# Altium PCB PCB1.PcbDoc
Units mil, origin at the board's own origin, x right, y up, seen from the top; angles counter-clockwise.
Board outline 3543.31 x 3543.31 mil, 2 copper layers (Top Layer, Bottom Layer); 103 components, 114 nets, 533 pads, 226 vias.
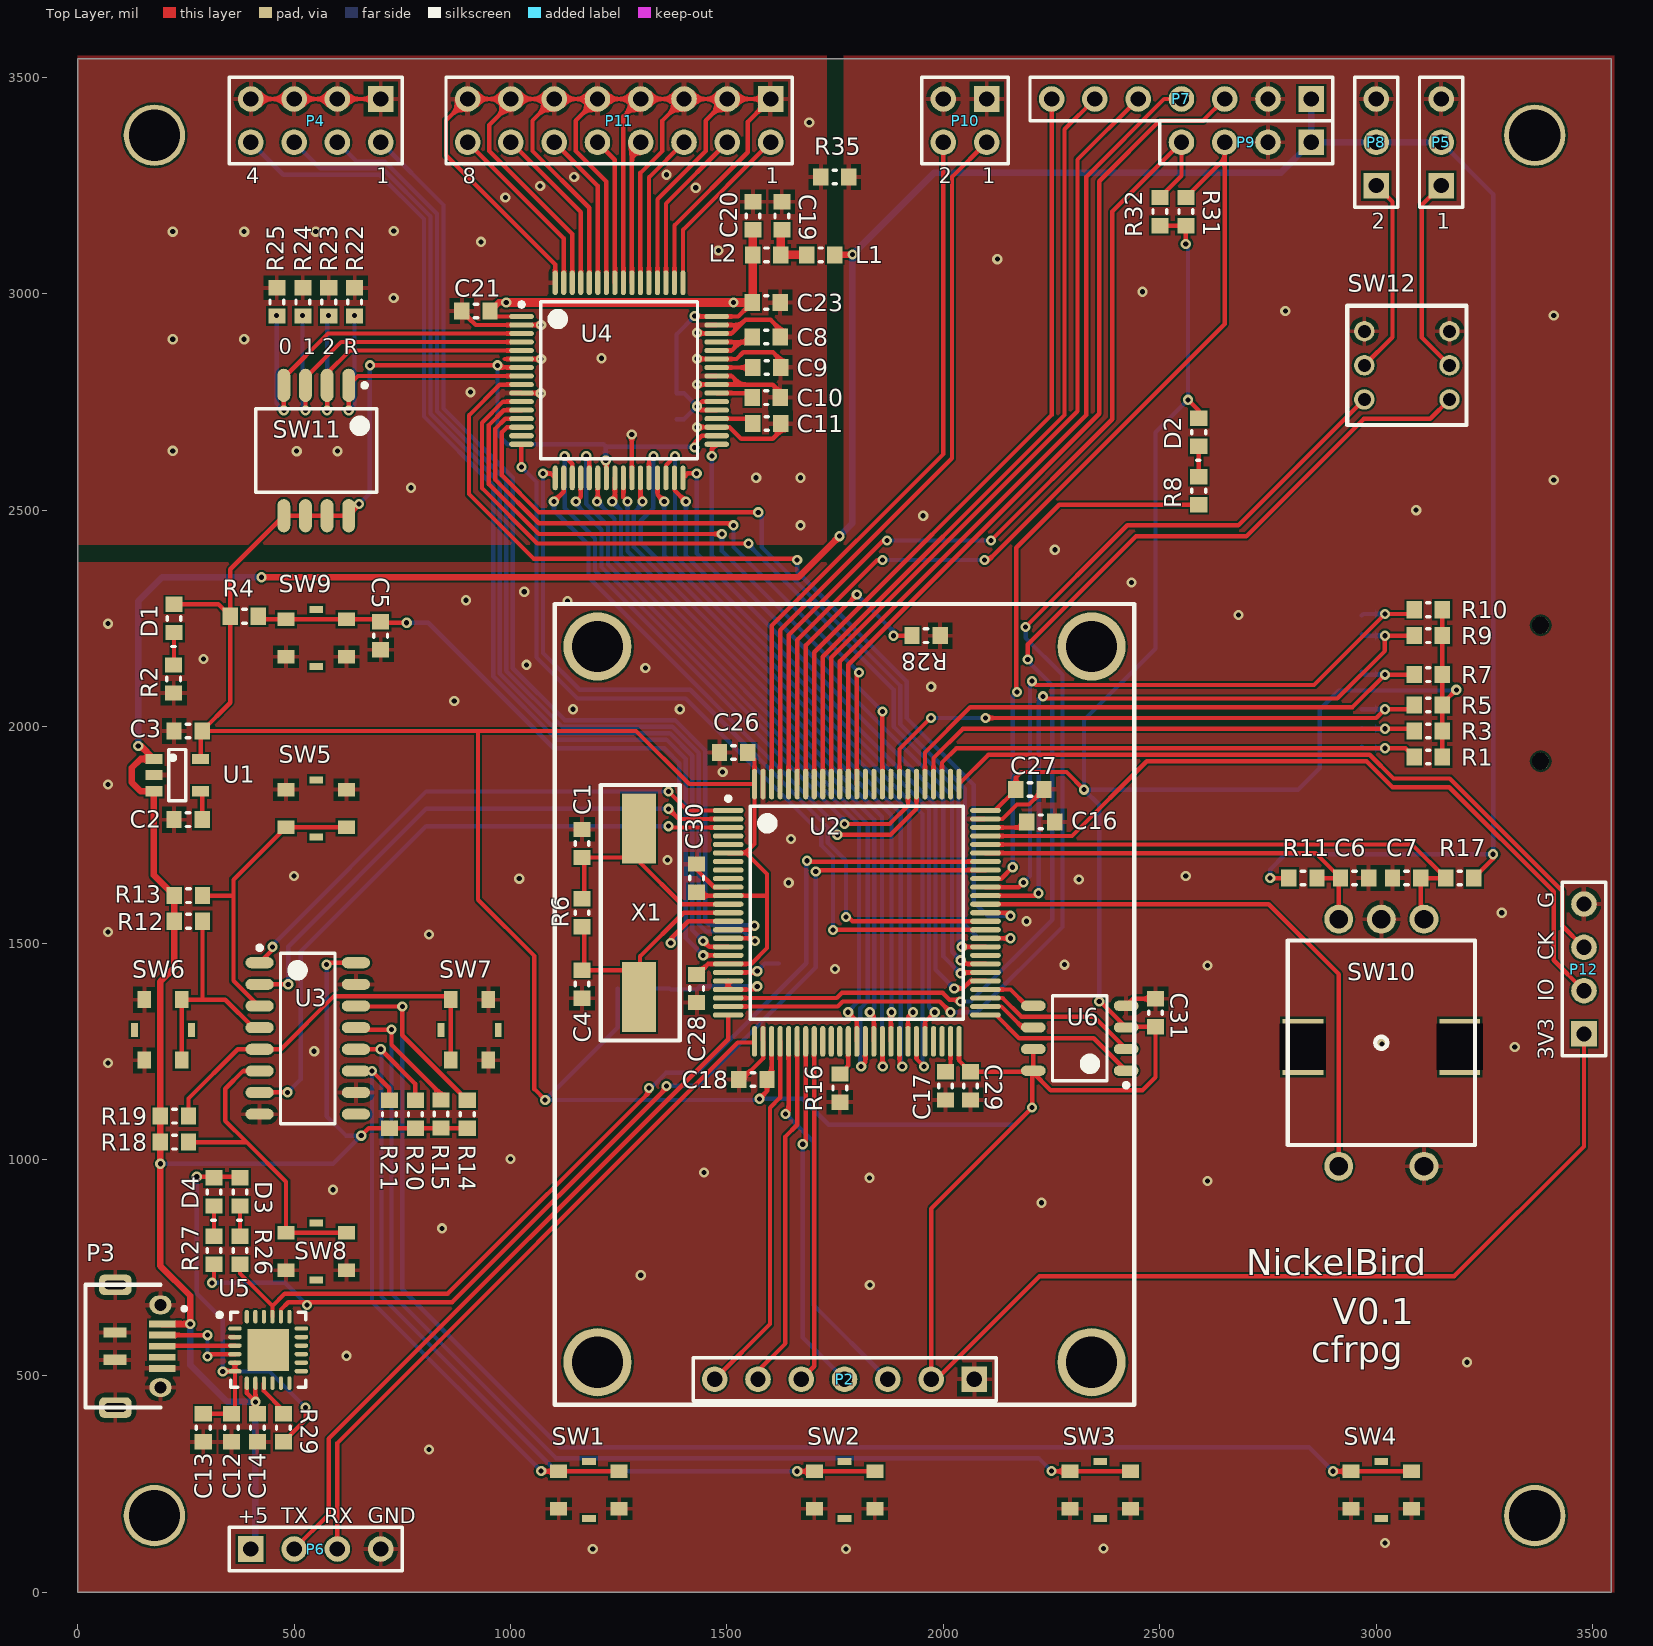
[diagram p0: Top Layer view]
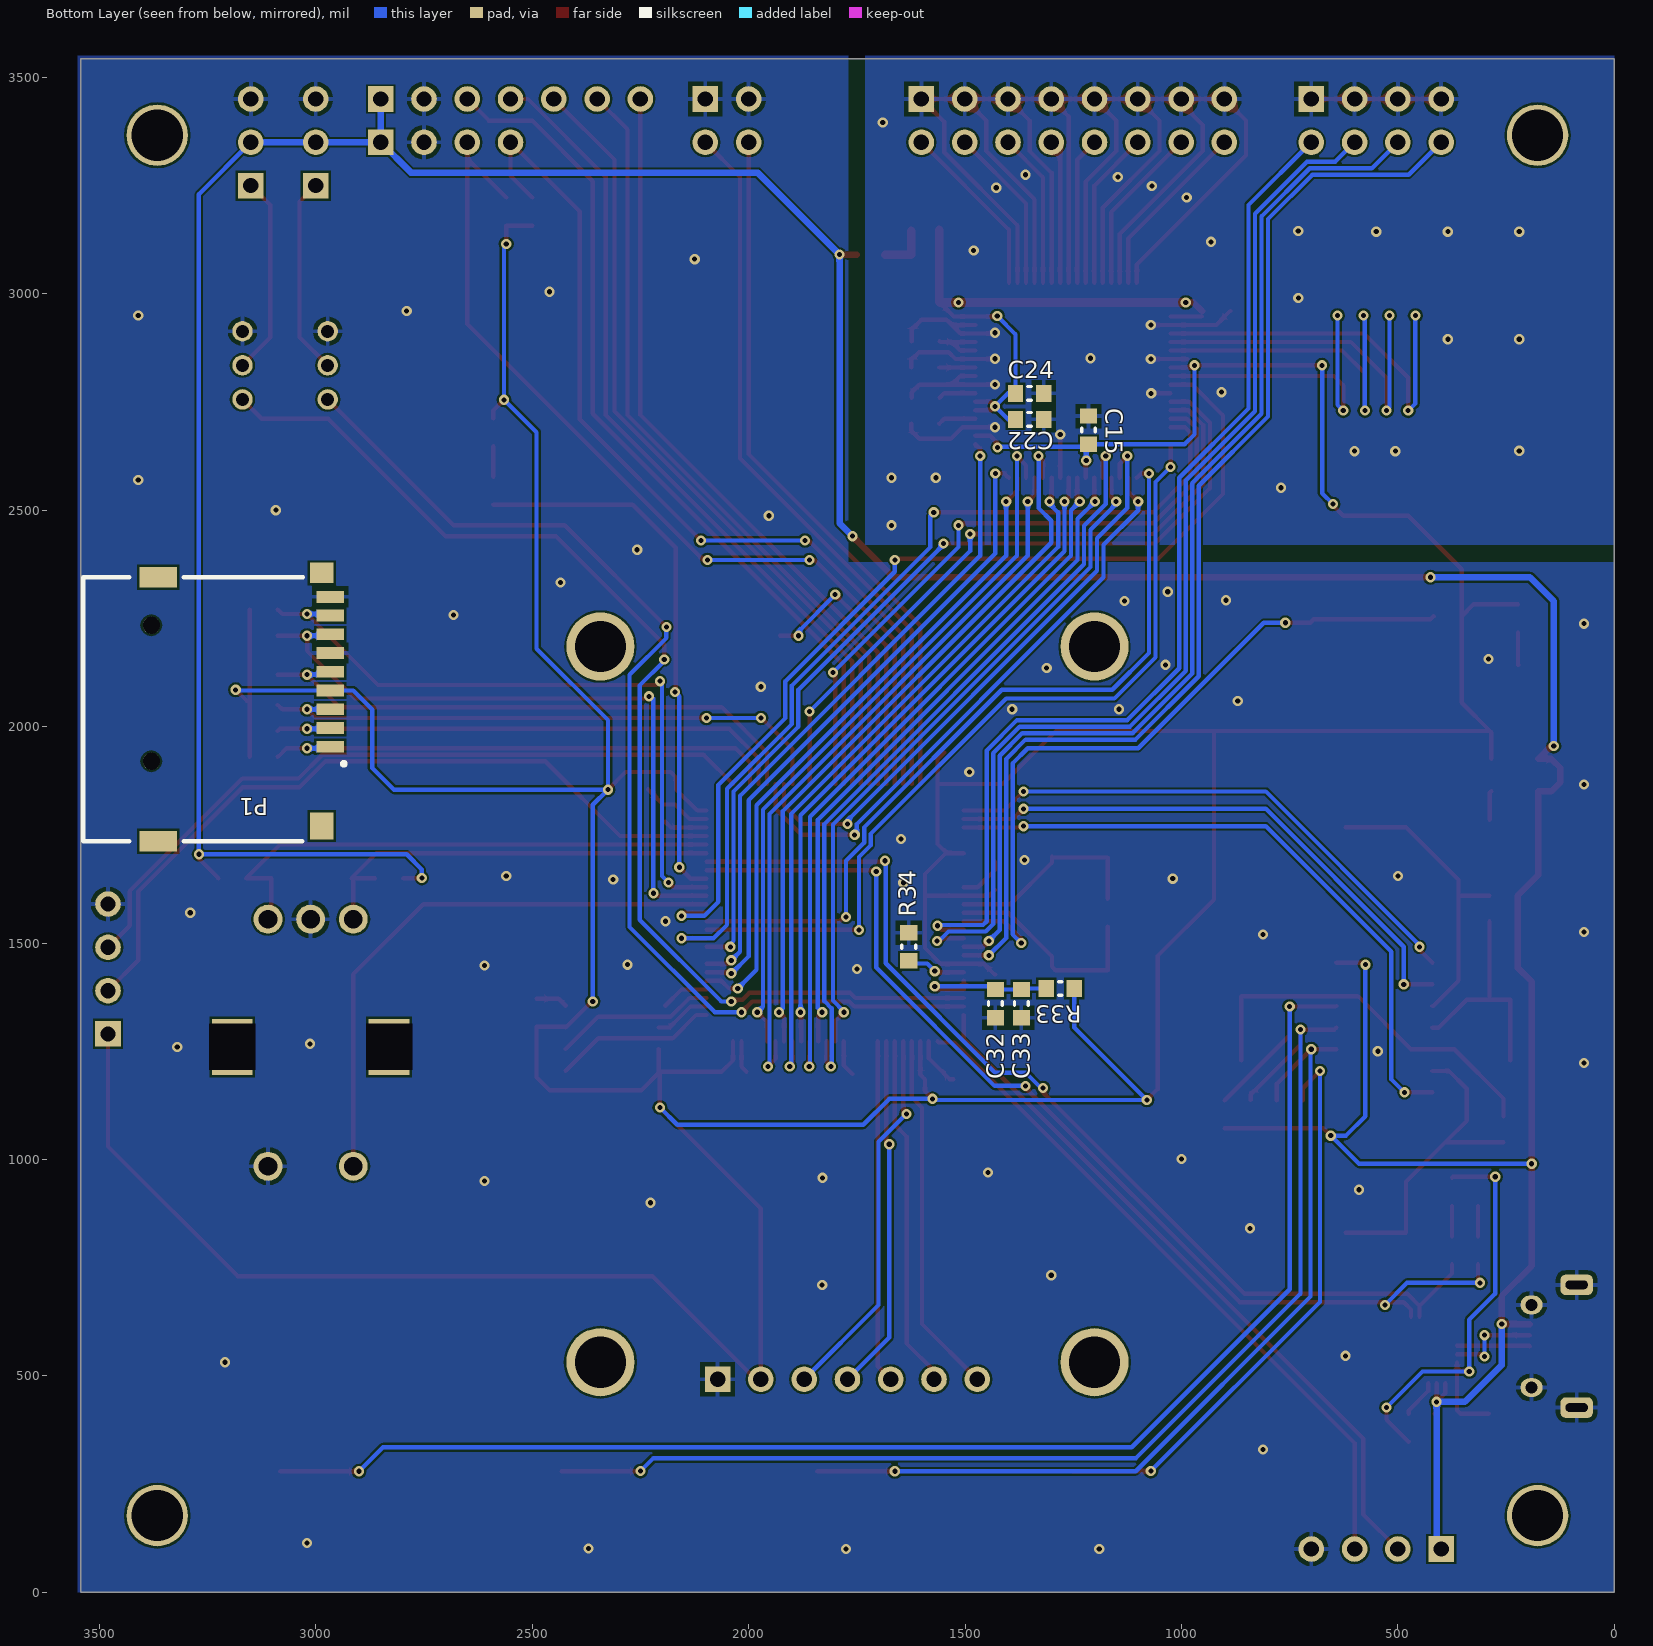
[diagram p1: Bottom Layer view, seen from below]

## Layer stack, top to bottom
Top Solder: solder mask 0.4, Solder Resist, Dk 3.5
Top Layer: signal copper 1.4
Dielectric 1: dielectric 12.6, FR-4, Dk 4.8
Bottom Layer: signal copper 1.4
Bottom Solder: solder mask 0.4, Solder Resist, Dk 3.5

## Board outline
0,0 3543.31,0 3543.31,3543.31 0,3543.31

## Design rules (kind name [scope] priority, off if disabled: settings)
Clearance [All] p1: gap=5 ignorepadtopadclearanceinfootprint=FALSE except(0: Arc-Hole Track-Hole SMDPad-Hole THPad-Hole Via-Hole Fill-Hole Poly-Hole Region-Hole Text-Hole)
PlaneConnect [All] p1: pad.planeconnectstyle=Relief pad.reliefexpansion=20 pad.reliefentries=4 pad.reliefconductorwidth=10 pad.reliefairgap=10 via.planeconnectstyle=Direct via.reliefexpansion=20 via.reliefentries=4 via.reliefconductorwidth=10 via.reliefairgap=10
PolygonConnect [All] p1: thpad.connectstyle=Relief thpad.reliefconductorwidth=10 thpad.reliefentries=4 thpad.polygonreliefangle="90 Angle" thpad.airgapwidth=10 smdpad.connectstyle=Relief smdpad.reliefconductorwidth=10 smdpad.reliefentries=4 smdpad.polygonreliefangle="90 Angle" smdpad.airgapwidth=10 via.connectstyle=Direct via.reliefconductorwidth=10 via.reliefentries=4 via.polygonreliefangle="90 Angle" via.airgapwidth=10
RoutingVias [All] p1: holewidth=11.81 width=23.62 viastyle="Through Hole" minholewidth=11.81 minwidth=23.62 maxholewidth=39.37 maxwidth=55.12
SolderMaskExpansion [All] p1: expansion=4
Width [All] p1: maxlimit=30 minlimit=5 preferedwidth=10 minimp=50.000000 maximp=50.000000 favimp=50.000000
29 further rules are at their usual default settings.

## Components (designator, comment, footprint, x,y, rotation, side; value= is the part's Value field where it differs from the comment)
C1 "20p" 0603 1165,1730 r90 top
C2 "470p" 0603 255,1785 r0 top
C3 "2.2u" 0603 255,1990 r0 top
C4 "20p" 0603 1165,1405 r270 top
C5 "1u" 0603 700,2210 r270 top
C6 "100n" 0603 2950,1650 r180 top
C7 "100n" 0603 3070,1650 r180 top
C8 "10u" 0603 1590.79,2900 r0 top
C9 "100n" 0603 1591.73,2829.53 r0 top
C10 "1u" 0603 1590.79,2760 r0 top
C11 "1u" 0603 1591.73,2700 r0 top
C12 "1u" 0603 355,380 r90 top
C13 "100n" 0603 290,380 r90 top
C14 "1u" 0603 415,380 r90 top
C15 "100n" 0603 1215,2685 r270 bottom
C16 "2.2u" 0603 2225,1780 r180 top
C17 "2.2u" 0603 2005,1170 r90 top
C18 "100n" 0603 1560,1185 r180 top
C19 "10u" 0603 1626.69,3180 r270 top
C20 "10u" 0603 1559.84,3180 r270 top
C21 "100n" 0603 920,2960 r0 top
C22 "100n" 0603 1350.79,2710 r0 bottom
C23 "100n" 0603 1590.79,2980 r180 top
C24 "100n" 0603 1350.79,2770 r0 bottom
C26 "100n" 0603 1515.35,1940 r0 top
C27 "100n" 0603 2200,1855 r180 top
C28 "100n" 0603 1430,1395 r90 top
C29 "100n" 0603 2062.52,1170 r90 top
C30 "100n" 0603 1430,1650 r270 top
C31 "100n" 0603 2490,1338.74 r270 top
C32 "100n" 0603 1430,1360 r270 bottom
C33 "10u" 0603 1370,1360 r270 bottom
D1 "LED" 0603-1 222.52,2250 r270 top
D2 "LED" 0603-1 2590,2680 r270 top
D3 "LED" 0603-1 375,925 r270 top
D4 "LED" 0603-1 315,925 r270 top
L1 "102" 0603 1716.69,3090 r180 top
L2 "102" 0603 1591.69,3090 r180 top
P1 "TFCard" "TF Card" 3380,2040.08 r270 bottom
P2 "Header 7" HDR1X7 2071.65,492.13 r180 top
P3 "MicroUSB" MicroUSB 17.99,568.5 r270 top
P4 "Header 4X2" HDR2X4 700,3450 r180 top
P5 "Header 3" HDR1X3 3150,3250 r90 top
P6 "Header 4" HDR1X4 400,100 r0 top
P7 "Header 7" HDR1X7 2850,3450 r180 top
P8 "Header 3" HDR1X3 3000,3250 r90 top
P9 "Header 4" HDR1X4 2850,3350 r180 top
P10 "Header 2X2" HDR2X2 2100,3450 r180 top
P11 "Header 8X2" HDR2X8 1600.79,3450 r180 top
P12 "Header 4" HDR1X4 3480,1290 r90 top
R1 "10k" 0603 3120,1930 r180 top
R2 "1k" 0603 221.73,2110 r270 top
R3 "10k" 0603 3120,1990 r180 top
R4 "10k" 0603 385,2255 r180 top
R5 "10k" 0603 3120,2050 r180 top
R6 "1M" 0603 1165,1570 r90 top
R7 "10k" 0603 3120,2120 r180 top
R8 "1k" 0603 2590,2545 r270 top
R9 "10k" 0603 3120,2210 r180 top
R10 "10k" 0603 3120,2270 r180 top
R11 "10k" 0603 2830.71,1650 r180 top
R12 "10k" 0603 255.91,1550.32 r180 top
R13 "10k" 0603 255.91,1609.37 r180 top
R14 "10k" 0603 900,1104.53 r270 top
R15 "10k" 0603 839.57,1105 r270 top
R16 "10k" 0603 1760.63,1165 r270 top
R17 "10k" 0603 3192.91,1650 r0 top
R18 "10k" 0603 223.43,1040 r0 top
R19 "10k" 0603 223.43,1100 r0 top
R20 "10k" 0603 780,1104.53 r90 top
R21 "10k" 0603 720,1104.53 r90 top
R22 "10k" 0603 640,2981.1 r90 top
R23 "10k" 0603 580,2981.1 r90 top
R24 "10k" 0603 520,2981.1 r90 top
R25 "10k" 0603 460,2981.1 r90 top
R26 "1k" 0603 375,790 r270 top
R27 "1k" 0603 315,790 r270 top
R28 "10k" 0603 1960,2210 r0 top
R29 "4.7k" 0603 475,380 r90 top
R31 "1.2k" 0603 2560,3190 r270 top
R32 "1.2k" 0603 2500,3190 r90 top
R33 "0R" 0603 1280,1395 r0 bottom
R34 "0R" 0603 1630,1491.26 r90 bottom
R35 "0R" 0603 1749.17,3270 r0 top
SW1 "Btn" BTN3*3 1181.1,236.22 r0 top locked
SW2 "Btn" BTN3*3 1771.65,236.22 r0 top locked
SW3 "Btn" BTN3*3 2362.2,236.22 r0 top locked
SW4 "Btn" BTN3*3 3011.81,236.22 r0 top locked
SW5 "Btn" BTN3*3 551.18,1811.02 r0 top locked
SW6 "Btn" BTN3*3 196.85,1299.21 r90 top locked
SW7 "Btn" BTN3*3 905.51,1299.21 r270 top locked
SW8 "Btn" BTN3*3 551.18,787.4 r180 top locked
SW9 "Btn" BTN3*3 551.18,2204.72 r0 top
SW10 "EC11" EC11 3110.24,984.25 r180 top
SW11 "SW-4P" SW-1.27-4P 551.18,2637.8 r270 top
SW12 "SW_DPDT" DPDT7mm 3070.87,2834.65 r180 top
U1 "MIC5219" SOT23-5 230,1887.99 r0 top
U2 "STM32F405VGT6" STM-LQFP100_N 1800,1570 r0 top
U3 "74LS165" SOP16 531.5,1279.53 r0 top
U4 "AD7606B" LQFP-64 1250.79,2800 r0 top
U5 "CP2104-GM" QFN-24-Pad 440,560 r0 top
U6 "MB85RS" SOP8 2315,1280 r180 top
X1 "8M" 49SMD 1296.73,1570 r90 top

## Footprints (in the part's own frame and the unit in brackets; to place one, negate y for a bottom-side part, rotate by r counter-clockwise, add the part's x,y. Pads: shape width x height; smd on the part's side, far side on the other; paste and mask are expansions set on the pad)
49SMD [mm] "Chip Capacitor, 2-Leads, Body 12.65x4.50mm, IPC High Density"
  rect 4.1x2 smd: 1(-4.95,0) 2(4.95,0)
  silkscreen extent -7.5,-2.4 7.5,2.25
0603 [mm]
  rect 0.9x1 smd: 1(-0.825,0) 2(0.825,0)
  silkscreen extent -0.1,-0.4 0.1,0.4
0603-1 [mm]
  rect 0.9x1 smd: 1(-0.825,0) 2(0.825,0)
  silkscreen extent -0.1,-0.4 1.65,0.4
BTN3*3 [mm]
  rect 1x0.8 smd: 1(-1.775,1.1) 1(1.775,1.1) 2(-1.775,-1.1) 2(1.775,-1.1)
  rect 0.8x0.4 smd: ""(0,-1.675) ""(0,1.675)
DPDT7mm [mm]
  round 1.2 hole 0.762: 1(-2.5,2) 2(-2.5,0) 3(-2.5,-2) 4(2.5,-2) 5(2.5,0) 6(2.5,2)
  silkscreen extent -3.5,-3.5 3.5,3.5
EC11 [mm]
  round 1.7 hole 1.1: 1(5,0) 2(0,0) 3(0,-14.5) 4(2.5,-14.5) 5(5,-14.5)
  rect 2.4x3.3 hole 2.7 square: ""(-2.1,-7) ""(7.1,-7)
  silkscreen extent -3,-13.25 8,-1.25
HDR1X3 [mm] "Connector; Header; 3 Position"
  rect 1.5x1.5 hole 0.9: 1(0,0)
  round 1.5 hole 0.9: 2(2.54,0) 3(5.08,0)
  silkscreen extent -1.27,-1.27 6.35,1.27
HDR1X4 [mm] "Connector; Header; 4 Position"
  rect 1.5x1.5 hole 0.9: 1(0,0)
  round 1.5 hole 0.9: 2(2.54,0) 3(5.08,0) 4(7.62,0)
  silkscreen extent -1.27,-1.27 8.89,1.27
HDR1X7 [mm] "Connector; Header; 7 Position"
  rect 1.5x1.5 hole 0.9: 1(0,0)
  round 1.5 hole 0.9: 2(2.54,0) 3(5.08,0) 4(7.62,0) 5(10.16,0) 6(12.7,0) 7(15.24,0)
  silkscreen extent -1.27,-1.27 16.51,1.27
HDR2X2 [mm] "Connector; Header; 2x2 Position"
  rect 1.5x1.5 hole 0.9: 1(0,0)
  round 1.5 hole 0.9: 2(0,2.54) 3(2.54,0) 4(2.54,2.54)
  silkscreen extent -1.27,-1.27 3.81,3.81
HDR2X4 [mm] "Connector; Header; 4x2 Position"
  rect 1.5x1.5 hole 0.9: 1(0,0)
  round 1.5 hole 0.9: 2(0,2.54) 3(2.54,0) 4(2.54,2.54) 5(5.08,0) 6(5.08,2.54) 7(7.62,0) 8(7.62,2.54)
  silkscreen extent -1.27,-1.27 8.89,3.81
HDR2X8 [mm] "Connector; Header; 8x2 Position"
  rect 1.5x1.5 hole 0.9: 1(0,0)
  round 1.5 hole 0.9: 2(0,2.54) 3(2.54,0) 4(2.54,2.54) 5(5.08,0) 6(5.08,2.54) 7(7.62,0) 8(7.62,2.54) 9(10.16,0) 10(10.16,2.54) 11(12.7,0) 12(12.7,2.54) 13(15.24,0) 14(15.24,2.54) 15(17.78,0) 16(17.78,2.54)
  silkscreen extent -1.27,-1.27 19.05,3.81
LQFP-64 [mm] "TSQFP, 64-Leads, Body 10.00x10.00mm, Pitch 0.50mm, IPC Medium Density"
  oval 1.45x0.3 smd: 1(-5.725,3.75) 2(-5.725,3.25) 3(-5.725,2.75) 4(-5.725,2.25) 5(-5.725,1.75) 6(-5.725,1.25) 7(-5.725,0.75) 8(-5.725,0.25) 9(-5.725,-0.25) 10(-5.725,-0.75) 11(-5.725,-1.25) 12(-5.725,-1.75) 13(-5.725,-2.25) 14(-5.725,-2.75) 15(-5.725,-3.25) 16(-5.725,-3.75) 33(5.725,-3.75) 34(5.725,-3.25) 35(5.725,-2.75) 36(5.725,-2.25) 37(5.725,-1.75) 38(5.725,-1.25) 39(5.725,-0.75) 40(5.725,-0.25) 41(5.725,0.25) 42(5.725,0.75) 43(5.725,1.25) 44(5.725,1.75) 45(5.725,2.25) 46(5.725,2.75) 47(5.725,3.25) 48(5.725,3.75)
  oval 0.3x1.45 smd: 17(-3.75,-5.725) 18(-3.25,-5.725) 19(-2.75,-5.725) 20(-2.25,-5.725) 21(-1.75,-5.725) 22(-1.25,-5.725) 23(-0.75,-5.725) 24(-0.25,-5.725) 25(0.25,-5.725) 26(0.75,-5.725) 27(1.25,-5.725) 28(1.75,-5.725) 29(2.25,-5.725) 30(2.75,-5.725) 31(3.25,-5.725) 32(3.75,-5.725) 49(3.75,5.725) 50(3.25,5.725) 51(2.75,5.725) 52(2.25,5.725) 53(1.75,5.725) 54(1.25,5.725) 55(0.75,5.725) 56(0.25,5.725) 57(-0.25,5.725) 58(-0.75,5.725) 59(-1.25,5.725) 60(-1.75,5.725) 61(-2.25,5.725) 62(-2.75,5.725) 63(-3.25,5.725) 64(-3.75,5.725)
  silkscreen extent -5.85,-4.6 4.6,4.6, body extent -6,-6 6,6, height 1.45
MicroUSB [mm]
  rect 0.4x1.55 smd: 1(-1.3,4.5) 2(-0.65,4.5) 3(0,4.5) 4(0.65,4.5) 5(1.3,4.5)
  rrect50% 1.2x1.9 hole 1.3 slot 0.5 at 0 deg: 6(-3.6,1.75) 6(3.6,1.75)
  oval 1.1x1.3 hole 0.7: 6(-2.425,4.4) 6(2.425,4.4)
  rect 0.6x1.35 smd: 6(-0.8,1.725) 6(0.8,1.725)
  silkscreen extent -3.6,0 3.6,5.9
QFN-24-Pad [mm]
  oval 0.8x0.25 smd: 1(-1.95,1.25) 2(-1.95,0.75) 3(-1.95,0.25) 4(-1.95,-0.25) 5(-1.95,-0.75) 6(-1.95,-1.25) 13(1.95,-1.25) 14(1.95,-0.75) 15(1.95,-0.25) 16(1.95,0.25) 17(1.95,0.75) 18(1.95,1.25)
  oval 0.25x0.8 smd: 7(-1.25,-1.95) 8(-0.75,-1.95) 9(-0.25,-1.95) 10(0.25,-1.95) 11(0.75,-1.95) 12(1.25,-1.95) 19(1.25,1.95) 20(0.75,1.95) 21(0.25,1.95) 22(-0.25,1.95) 23(-0.75,1.95) 24(-1.25,1.95)
  rect 2.45x2.45 smd: 25(0,0)
  silkscreen extent -2.97,-2.2 2.2,2.2
SOP8 [mm] "SOIC, 8-Leads, Body 4.91x3.90mm, Pitch 1.27mm, IPC Medium Density"
  oval 1.45x0.6 smd: 1(-2.725,1.905) 2(-2.725,0.635) 3(-2.725,-0.635) 4(-2.725,-1.905) 5(2.725,-1.905) 6(2.725,-0.635) 7(2.725,0.635) 8(2.725,1.905)
  silkscreen extent -2.85,-2.5 1.6,2.88
SOP16 [mm] "SOP, 16-Leads, Body 9.90x3.91mm, Pitch 1.27mm, IPC Low Density"
  oval 1.65x0.65 smd: 1(-2.825,4.445) 2(-2.825,3.175) 3(-2.825,1.905) 4(-2.825,0.635) 5(-2.825,-0.635) 6(-2.825,-1.905) 7(-2.825,-3.175) 8(-2.825,-4.445) 9(2.825,-4.445) 10(2.825,-3.175) 11(2.825,-1.905) 12(2.825,-0.635) 13(2.825,0.635) 14(2.825,1.905) 15(2.825,3.175) 16(2.825,4.445)
  silkscreen extent -2.95,-5 1.6,5.44
SOT23-5 [mm] "SOT23, 5-Leads, Body 2.90x2.80mm, Pitch 0.95mm, IPC Medium Density"
  rect 1x0.6 smd: 1(-1.375,0.95) 2(-1.375,0) 3(-1.375,-0.95) 4(1.375,-0.95) 5(1.375,0.95)
  silkscreen extent -0.5,-1.5 0.5,1.5
STM-LQFP100_N [mm] "Thin QFP, 100-Leads, Body 14x14mm, Pitch 0.5mm, IPC Medium Density"
  oval 1.8x0.3 smd: 1(-7.55,6) 2(-7.55,5.5) 3(-7.55,5) 4(-7.55,4.5) 5(-7.55,4) 6(-7.55,3.5) 7(-7.55,3) 8(-7.55,2.5) 9(-7.55,2) 10(-7.55,1.5) 11(-7.55,1) 12(-7.55,0.5) 13(-7.55,0) 14(-7.55,-0.5) 15(-7.55,-1) 16(-7.55,-1.5) 17(-7.55,-2) 18(-7.55,-2.5) 19(-7.55,-3) 20(-7.55,-3.5) 21(-7.55,-4) 22(-7.55,-4.5) 23(-7.55,-5) 24(-7.55,-5.5) 25(-7.55,-6) 51(7.55,-6) 52(7.55,-5.5) 53(7.55,-5) 54(7.55,-4.5) 55(7.55,-4) 56(7.55,-3.5) 57(7.55,-3) 58(7.55,-2.5) 59(7.55,-2) 60(7.55,-1.5) 61(7.55,-1) 62(7.55,-0.5) 63(7.55,0) 64(7.55,0.5) 65(7.55,1) 66(7.55,1.5) 67(7.55,2) 68(7.55,2.5) 69(7.55,3) 70(7.55,3.5) 71(7.55,4) 72(7.55,4.5) 73(7.55,5) 74(7.55,5.5) 75(7.55,6)
  oval 0.3x1.8 smd: 26(-6,-7.55) 27(-5.5,-7.55) 28(-5,-7.55) 29(-4.5,-7.55) 30(-4,-7.55) 31(-3.5,-7.55) 32(-3,-7.55) 33(-2.5,-7.55) 34(-2,-7.55) 35(-1.5,-7.55) 36(-1,-7.55) 37(-0.5,-7.55) 38(0,-7.55) 39(0.5,-7.55) 40(1,-7.55) 41(1.5,-7.55) 42(2,-7.55) 43(2.5,-7.55) 44(3,-7.55) 45(3.5,-7.55) 46(4,-7.55) 47(4.5,-7.55) 48(5,-7.55) 49(5.5,-7.55) 50(6,-7.55) 76(6,7.55) 77(5.5,7.55) 78(5,7.55) 79(4.5,7.55) 80(4,7.55) 81(3.5,7.55) 82(3,7.55) 83(2.5,7.55) 84(2,7.55) 85(1.5,7.55) 86(1,7.55) 87(0.5,7.55) 88(0,7.55) 89(-0.5,7.55) 90(-1,7.55) 91(-1.5,7.55) 92(-2,7.55) 93(-2.5,7.55) 94(-3,7.55) 95(-3.5,7.55) 96(-4,7.55) 97(-4.5,7.55) 98(-5,7.55) 99(-5.5,7.55) 100(-6,7.55)
  silkscreen extent -7.67,-6.25 6.25,6.82, body extent -7,-7 7,7, height 1.6
SW-1.27-4P [mm]
  oval 1.95x0.76 smd: 1(-3.825,1.905) 2(-3.825,0.635) 3(-3.825,-0.635) 4(-3.825,-1.905) 5(3.825,-1.905) 6(3.825,-0.635) 7(3.825,0.635) 8(3.825,1.905)
  silkscreen extent -3.95,-3.55 2.45,3.55, body extent -4.18,-3.55 4.18,3.55, height 2.3
"TF Card" [mm]
  rect 0.7x1.6 smd: 1(2.2,10.5) 2(1.1,10.5) 3(0,10.5) 4(-1.1,10.5) 5(-2.2,10.5) 6(-3.3,10.5) 7(-4.4,10.5) 8(-5.5,10.5) 9(-6.6,10.5)
  rect 1.2x1.4 smd: ""(-8,10)
  rect 1.2x2.2 smd: ""(-7.75,0.4) ""(7.75,0.4)
  round 1 hole 1: ""(-4.93,0) ""(3.05,0)
  rect 1.6x1.4 smd: ""(6.85,10)
  silkscreen extent -7.75,-4 7.75,11.4

## Part data
C1 C2 C3 C4 C5 C6 C7 C8 C9 C10 C11 C12 C13 C14 C15 C16 C17 C18 C19 C20 C21 C22 C23 C24 C26 C27 C28 C29 C30 C31 C32 C33: library part Cap
L1 L2: library part Inductor, "BLM18RK102SN1D"
P2 P7: "Header, 7-Pin", LatestRevisionDate=17-Jul-2002, LatestRevisionNote="Re-released for DXP Platform.", Publisher="Altium Limited"
P4: "Header, 4-Pin, Dual row", LatestRevisionDate=17-Jul-2002, LatestRevisionNote="Re-released for DXP Platform.", Publisher="Altium Limited"
P5 P8: "Header, 3-Pin", LatestRevisionDate=17-Jul-2002, LatestRevisionNote="Re-released for DXP Platform.", Publisher="Altium Limited"
P6 P9 P12: "Header, 4-Pin", LatestRevisionDate=17-Jul-2002, LatestRevisionNote="Re-released for DXP Platform.", Publisher="Altium Limited"
P10: "Header, 2-Pin, Dual row", LatestRevisionDate=17-Jul-2002, LatestRevisionNote="Re-released for DXP Platform.", Publisher="Altium Limited"
P11: "Header, 8-Pin, Dual row", LatestRevisionDate=17-Jul-2002, LatestRevisionNote="Re-released for DXP Platform.", Publisher="Altium Limited"
R1 R2 R3 R4 R5 R6 R7 R8 R9 R10 R11 R12 R13 R14 R15 R16 R17 R18 R19 R20 R21 R22 R23 R24 R25 R26 R27 R28 R29 R31 R32 R33 R34 R35: library part Res
U2: "ARM Cortex-M4 32-bit MCU+FPU, 210 DMIPS, 1024 kB Flash, 192 kB Internal RAM, 82 I/Os, 100-pin LQFP, -40 to 85 degC, Tray", I/Os (High Current)=82, Manufacturer=STMicroelectronics, Operating Frequency(F) (Processor speed) (MHz)=168, Supplier Part Number 1=497-11910-ND, Supply Voltage(Vcc) max (V)=3.6, Supply Voltage(Vcc) min (V)=1.8, ComponentLink1Description="Manufacturer URL", ComponentLink1URL=http://www.st.com/web/en/home.html, ComponentLink2Description=Datasheet, ComponentLink2URL=http://www.st.com/st-web-ui/static/active/en/resource/technical/document/datasheet/DM00037051.pdf, ComponentLink3Description="Package Specification", ComponentLink3URL=http://www.st.com/st-web-ui/static/active/en/resource/technical/document/data_brief/DM00071938.pdf, Core="ARM Cortex-M4", D/A Converter=2x12-bit, DatasheetVersion="Rev. 4", FLASH Size (Prog) (kB)=1024, Internal RAM Size (kB)=192, Mounting Technology="Surface Mount", PackageDescription="100-Pin Low Profile Quad Flat Package, 14 x 14 mm Body, 0.5 mm Pitch", PackageReference=LQFP100, PackageVersion="Rev. 1, 06/2013", Packing=Tray, PartNumber=STM32F405VGT6, Supplier 1=Digi-Key, Supplier 2=Farnell, Supplier 3=Newark, Supplier 4=Newark, Supplier 5=Mouser, Supplier Part Number 2=2215224, Supplier Part Number 3=46W2199, Supplier Part Number 4=94T6493, Supplier Part Number 5=511-STM32F405VGT6
X1: library part XTAL

## Free pads (board coordinates)
  round 141.73 hole 118.11: ""(177.17,177.17) ""(177.17,3366.14) ""(3366.14,177.17) ""(3366.14,3366.14)
  round 157.48 hole 118.11: ""(1200.79,531.5) ""(1200.79,2185.04) ""(2342.52,531.5) ""(2342.52,2185.04)

## Via types
v1: diameter 23.62, hole 11.81, Top Layer to Bottom Layer, tented both sides, 226 vias

## Nets (pads, with @x,y where several pads share a name; then routed paths per layer and width w, separated by ;. In a path a pad name is that pad's centre, name@x,y a point inside that pad or via, vN(x,y) a via of type N, cw(c..) or ccw(c..) an arc to the next point about the centre after c; other vN are vias at no path point)
+5: C14.2 L1.1 P3.1 P5.2 P6.1 P7.1 P8.2 P9.1 R11.2 R12.2 R13.2 R14.2 R15.2 R17.2 R18.1 R19.1 R20.1 R21.1 U1.1 U1.3 U3.16 U5.7 U5.8 | length 10207.9
  Top Layer w10: v1(140,1955) v1@146.26,1955 ; U5.7 390.79,459.68 v1(410.47,440) ; U5.8 v1(410.47,440) ; C14.2 410.47,417.01 v1(410.47,440) ; v1(575,1450) 579.53,1454.53 U3.16 ; v1(655,1055) 672.05,1072.05 R21.1 R20.1 R14.2 ; L1.1 L1.1@1749.8,3090.63 ; v1(2755,1650) R11.2 ; R17.2 3270,1694.61 v1(3270,1705)
  Top Layer w15: v1@146.26,1955 U1.1 145.39,1925.39 125,1905 125,1870.91 145.31,1850.59 U1.3 175.87,1656.93 R13.2 R12.2 223.43,1443.43 190.94,1410.94 R19.1 R18.1 v1(190.94,990) 190.94,754.06 260,685 v1(260,619.68) P3.1 ; v1(424.45,2345) 1665,2345 v1(1760,2440) ; L1.1@1749.8,3090.63 v1(1790,3090.63)
  Bottom Layer w10: v1(190.94,990) 590,990 v1(655,1055) 620,1055 575,1100 v1(575,1450) ; P6.1 P6.1@410.47,110.47 ; v1(2755,1650) 2755,1670 2790,1705 v1(3270,1705) ; P5.2 3270,3230 v1@3270,1715
  Bottom Layer w15: v1(140,1955) 140,2290 195,2345 v1(424.45,2345) ; v1(260,619.68) 260,525 345,440 v1(410.47,440) P6.1@410.47,110.47 ; v1(1760,2440) 1790,2470 v1(1790,3090.63) 1979.37,3280 2780,3280 P9.1 ; P7.1 P9.1 ; P5.2 P8.2 P9.1
AD7606_BUSY: U2.60 U4.14 | length 2103.8
  Top Layer w10: U4.14 991.73,2691.73 980,2680 980,2580.79 1065.79,2495 v1(1572.2,2495) ; U2.60 v1(2155,1510.94)
  Bottom Layer w10: v1(1572.2,2495) 1580,2487.2 1580,2415 1900,2095 1900,2006.21 2050,1856.21 2050,1541.89 2080.94,1510.94 v1(2155,1510.94)
AD7606_CLK: U2.85 U4.12 | length 1543.6
  Top Layer w10: U4.12 984.37,2731.1 950,2696.73 950,2560 1065,2445 v1(1488.19,2445) ; U2.85 v1(1859.06,2035)
  Bottom Layer w10: v1(1488.19,2445) 1488.19,2405.87 v1(1859.06,2035)
AD7606_CONV: U2.63 U4.9 | length 2271.7
  Top Layer w10: U4.9 975.16,2790.16 904.06,2719.06 904.06,2537.36 1053.94,2387.48 1659.72,2387.48 v1(1662.2,2385) ; U2.63 2147.87,1570 v1(2155,1562.87)
  Bottom Layer w10: v1(1662.2,2385) 1662.2,2357.8 1915,2105 1915,2020 2070,1865 2070,1595 2102.13,1562.87 v1(2155,1562.87)
AD7606_CS: U2.88 U4.13 | length 1504.7
  Top Layer w10: U4.13 987.99,2711.42 965,2688.43 965,2570 1065,2470 1515,2470 v1(1515,2465) ; U2.88 1800,2120 v1(1805,2125)
  Bottom Layer w10: v1(1515,2465) 1515,2415 v1(1805,2125)
AD7606_D0: U2.61 U4.16 | length 1919.7
  Top Layer w10: v1(1025,2600) 1025,2651.97 U4.16 ; v1(1745,1530) 1745.63,1530.63 U2.61
  Bottom Layer w10: v1(1025,2600) 1060,2565 1060,2160 1155,2065 1405,2065 1718.19,1751.81 1718.19,1725.6 1745,1698.79 v1(1745,1530)
AD7606_D1: U2.62 U4.17 | length 1823
  Top Layer w10: v1(1075,2585) 1092.76,2585 U4.17 ; v1(1775,1560) 1780.31,1560 1790,1550.32 U2.62
  Bottom Layer w10: v1(1075,2585) 1075,2170 1160,2085 1415,2085 1733.19,1766.81 1733.19,1731.81 1775,1690 v1(1775,1560)
AD7606_D2: U2.81 U4.18 | length 1370.3
  Top Layer w10: v1(1100,2520) 1122.83,2542.83 U4.18 ; v1(1755,1750) 1877.8,1750 1937.8,1810 U2.81
  Bottom Layer w10: v1(1100,2520) 1100,2500 1180,2420 1180,2345 1749.84,1775.16 1749.84,1755.16 v1(1755,1750)
AD7606_D3: U2.82 U4.19 | length 1381
  Top Layer w10: v1(1125,2625) 1142.52,2607.48 U4.19 ; v1(1771.65,1775) 1875.75,1775 1918.11,1817.36 U2.82
  Bottom Layer w10: v1(1125,2625) 1125,2505 1195,2435 1195,2360 v1@1771.65,1783.35
AD7606_D4: U2.38 U4.20 | length 1596.2
  Top Layer w10: v1(1150.79,2520) 1162.2,2531.42 U4.20 ; v1(1780,1340) 1800,1320 U2.38
  Bottom Layer w10: v1(1150.79,2520) 1150.79,2514.21 1210,2455 1210,2368.79 1805,1773.79 1805,1367.06 1780,1342.06 v1(1780,1340)
AD7606_D5: U2.39 U4.21 | length 1802
  Top Layer w10: v1(1175,2625) 1181.89,2618.11 U4.21 ; v1(1810,1215) 1819.69,1224.68 U2.39
  Bottom Layer w10: v1(1175,2625) 1175,2514.15 1225,2464.15 1225,2375 1825,1775 1825,1365.85 1808.19,1349.03 1808.19,1216.81 v1(1810,1215)
AD7606_D6: U2.40 U4.22 | length 1575.6
  Top Layer w10: v1(1200,2520) 1201.57,2521.57 U4.22 ; v1(1830,1340) 1839.37,1330.63 U2.40
  Bottom Layer w10: v1(1200,2520) 1240,2480 1240,2385 1840,1785 1840,1350 v1(1830,1340)
AD7606_D7: U2.41 U4.24 | length 1679.1
  Top Layer w10: v1(1235,2520) 1240.94,2525.94 U4.24 ; U2.41 1859.06,1215.94 v1(1860,1215)
  Bottom Layer w10: v1(1235,2520) 1255,2500 1255,2395 1858.19,1791.81 1858.19,1216.81 v1(1860,1215)
AD7606_D8: U2.42 U4.25 | length 1558.9
  Top Layer w10: U4.25 1260.63,2529.37 v1(1270,2520) ; U2.42 1878.74,1338.74 v1(1880,1340)
  Bottom Layer w10: v1(1270,2520) 1270,2405 1880,1795 v1(1880,1340)
AD7606_D9: U2.43 U4.27 | length 1687.3
  Top Layer w10: U4.27 1300,2525 v1(1305,2520) ; U2.43 1898.43,1221.57 v1(1905,1215)
  Bottom Layer w10: v1(1305,2520) 1305,2515 1285,2495 1285,2415 1901.81,1798.19 1901.81,1218.19 v1(1905,1215)
AD7606_D10: U2.44 U4.28 | length 1677.8
  Top Layer w10: U4.28 1319.69,2614.68 v1(1330,2625) ; U2.44 1918.11,1328.11 v1(1930,1340)
  Bottom Layer w10: v1@1330,2618.19 1330,2505 1300.79,2475.79 1300.79,2425 1920.79,1805 1920.79,1349.21 v1(1930,1340)
AD7606_D11: U2.45 U4.29 | length 1679.5
  Top Layer w10: U4.29 1339.37,2535.63 v1(1355,2520) ; U2.45 1937.8,1232.2 v1(1955,1215)
  Bottom Layer w10: v1(1355,2520) 1355,2395 1951.81,1798.19 1951.81,1218.19 v1(1955,1215)
AD7606_D12: U2.46 U4.30 | length 1669.2
  Top Layer w10: U4.30 1359.06,2604.06 v1(1380,2625) ; U2.46 1957.48,1317.48 v1(1980,1340)
  Bottom Layer w10: v1(1380,2625) 1380,2395 1966.81,1808.19 1966.81,1353.19 v1(1980,1340)
AD7606_D13: U2.55 U4.31 | length 1526.8
  Top Layer w10: U4.31 1378.74,2546.26 v1(1405,2520) ; v1(2025,1395) 2045,1395 2062.52,1412.52 U2.55
  Bottom Layer w10: v1(1405,2520) 1405,2395 1981.81,1818.19 1981.81,1438.19 v1(2025,1395)
AD7606_D14: U2.56 U4.32 | length 1502.2
  Top Layer w10: U4.32 1408.82,2585 v1(1430,2585) ; v1(2040,1430) 2042.2,1432.2 U2.56
  Bottom Layer w10: v1(1430,2585) 1430,2400 2000,1830 2000,1469.15 2039.15,1430 v1(2040,1430)
AD7606_D15: U2.57 U4.33 | length 1495.8
  Top Layer w10: v1(1465,2625) 1465,2641.18 U4.33 ; v1(2040,1460) 2048.11,1451.89 U2.57
  Bottom Layer w10: v1(1465,2625) 1465,2395 2020,1840 2020,1480 v1(2040,1460)
AD7606_OS0: R25.1 SW11.4 U4.3 | length 894.3
  Top Layer w10: v1(476.18,2730) SW11.4 476.18,2806.18 578.27,2908.27 U4.3
  Bottom Layer w10: v1(459.53,2949.72) 459.53,2746.65 v1(476.18,2730)
AD7606_OS1: R24.1 SW11.3 U4.4 | length 832
  Top Layer w10: v1(526.18,2730) SW11.3 526.18,2806.18 608.58,2888.58 U4.4
  Bottom Layer w10: v1(519.53,2949.72) 519.53,2736.65 v1(526.18,2730)
AD7606_OS2: R23.1 SW11.2 U4.5 | length 778.3
  Top Layer w10: v1(576.18,2730) SW11.2 576.18,2816.18 628.9,2868.9 U4.5
  Bottom Layer w10: v1(576.18,2730) 576.18,2946.38 v1(579.53,2949.72)
AD7606_RNG: R22.1 SW11.1 U4.8 | length 691.7
  Top Layer w10: v1(626.18,2730) SW11.1 647.64,2809.84 U4.8
  Bottom Layer w10: v1(626.18,2730) 639.53,2743.35 v1(639.53,2949.72)
AD7606_RST: U2.59 U4.11 | length 2122.3
  Top Layer w10: U4.11 982.84,2750.79 934.06,2702 934.06,2550.94 1061.81,2423.19 v1(1550,2423.19) ; v1(2042.2,1491.26) U2.59
  Bottom Layer w10: v1(1550,2423.19) 1550,2420 1885,2085 1885,2000 2035,1850 2035,1505 2042.2,1497.8 v1(2042.2,1491.26)
ADC_IN10: P4.2 U2.15 | length 2442.8
  Top Layer w10: U2.15 1554.41,1530.63 v1(1563.78,1540)
  Bottom Layer w10: P4.2 845,3205 845,2735 1005,2575 1005,2135 1125,2015 1380,2015 1450,1945 1450,1550.12 1458.31,1541.81 1561.97,1541.81 v1(1563.78,1540)
ADC_IN11: P4.4 U2.16 | length 2550.2
  Top Layer w10: U2.16 1559.06,1510.94 v1(1565,1505)
  Bottom Layer w10: P4.4 645,3305 710,3305 830,3185 830,2728.79 990,2568.79 990,2128.79 1118.79,2000 1373.79,2000 1435,1938.79 1435,1543.9 1452.09,1526.81 1538.19,1526.81 1560,1505 v1(1565,1505)
ADC_IN12: P4.6 U2.17 | length 2533.5
  Top Layer w10: v1(1445,1505) 1458.74,1491.26 U2.17
  Bottom Layer w10: P4.6 560,3290 703.79,3290 815,3178.79 815,2722.57 975,2562.57 975,2122.57 1112.57,1985 1367.57,1985 1420,1932.57 1420,1530 v1(1445,1505)
ADC_IN13: P4.8 U2.18 | length 2648
  Top Layer w10: v1(1445,1471.57) U2.18
  Bottom Layer w10: P4.8 475,3275 697.57,3275 800,3172.57 800,2716.36 960,2556.36 960,2116.36 1106.36,1970 1360,1970 1405,1925 1405,1511.57 v1(1445,1471.57)
AGND: C8.2 C9.2 C10.2 C11.2 C15.1 C19.1 C20.1 C21.1 C22.1 C23.1 C24.1 P4.1 P4.3 P4.5 P4.7 P11.1 P11.3 P11.5 P11.7 P11.9 P11.11 P11.13 P11.15 R22.2 R23.2 R24.2 R25.2 R35.1 U4.2 U4.6 U4.10 U4.26 U4.35 U4.40 U4.41 U4.43 U4.46 U4.47 U4.50 U4.52 U4.54 U4.56 U4.58 U4.60 U4.62 U4.64 | length 6417.7
  Top Layer w10: P4.7 P4.5 P4.3 P4.1 ; C21.1 919.57,2927.95 U4.2 v1(1070.79,2927.95) ; 986.28,2849.21 U4.6 v1(1070.79,2849.21) ; U4.10 1069.53,2770.47 v1(1070,2770) ; U4.64 1103.15,3067.64 850.79,3320 850.79,3400 P11.15 P11.13 ; U4.62 1142.52,3138.27 950.79,3330 950.79,3390 1000.79,3440 P11.13 ; U4.60 1181.89,3198.9 1050.79,3330 1050.79,3400 P11.11 ; U4.58 1221.26,3259.53 1150.79,3330 1150.79,3400 P11.9 ; U4.56 1260.63,3409.84 P11.7 ; v1(1280,2675) 1280,2574.92 U4.26 ; U4.54 1300,3279.21 1350.79,3330 1350.79,3400 P11.5 ; U4.52 1339.37,3218.58 1450.79,3330 1450.79,3400 P11.3 ; U4.50 1378.74,3157.95 1547.83,3327.05 1547.83,3397.05 P11.1 P11.3 ; v1(1430.79,2691.73) U4.35 1505.94,2691.73 1532.68,2665 1605.79,2665 1624.21,2683.43 C11.2 ; v1(1430.79,2790.16) U4.40 1530.79,2790.16 ; v1(1430.79,2850) 1431.57,2849.21 U4.43 1521.89,2849.21 1537.68,2865 1606.42,2865 1624.21,2847.2 C9.2 ; v1(1430.79,2910) 1432.52,2908.27 U4.46 1511.06,2908.27 1530.75,2927.95 ; U4.41 1511.1,2809.84 1530.79,2790.16 ; U4.47 1530.75,2927.95 ; C10.2 1623.27,2772.68 1605.79,2790.16 1530.79,2790.16 ; C8.2@1623.27,2890 C8.2 1623.27,2917.52 1600.79,2940 1542.8,2940 1530.75,2927.95 ; P11.13 P11.11 ; P11.11 P11.9 ; P11.9 P11.7 ; P11.7 P11.5 ; P11.5 P11.3
  other v1: 1670,2465 770,2551.97 1567.42,2574.92 1670,2574.92 505.83,2636.38 600,2636.38 219.52,2637.12 907.57,2772.68 1210,2851.09 219.52,2895.03 384.56,2895.03 730,2990 1480,3100 931.44,3120 219.52,3143.41 384.56,3143.41 550,3143.41 730.16,3145 987.99,3222.48 1427.86,3244.99 1068.44,3249.21 1147.01,3270 1360,3275 1690,3395.78
AVCC: C20.2 C21.2 C22.2 C23.2 C24.2 L2.2 U4.1 U4.37 U4.38 U4.48 | length 1415.8
  Top Layer w10: C21.2@953.27,2947.64 U4.1 ; v1(1425.53,2948.5) 1426.39,2947.64 U4.48 1525.94,2947.64 C23.2 C23.2@1559.21,2980.91 ; U4.37 1439.69,2731.1 v1(1430.79,2740) 1441.57,2750.79 U4.38 ; L2.2 L2.2@1559.84,3090.63
  Top Layer w15: C21.2 972.48,2980 v1(990,2980)
  Top Layer w20: v1(990,2980) v1(1515,2980) C23.2 ; C23.2@1559.21,2980.91 L2.2 ; L2.2@1559.84,3090.63 C20.2
  Bottom Layer w10: C22.2 1400.79,2710 v1(1430.79,2740) 1400.79,2770 C24.2 1383.27,2906.23 v1(1425.53,2948.5)
D+: P3.3 U5.3 | length 168.6
  Top Layer w10: P3.3 196.5,569.84 U5.3
D-: P3.2 U5.4 | length 219.3
  Top Layer w10: P3.2 v1(300,594.09) ; v1(300,545) 305.16,550.16 U5.4
  Bottom Layer w10: v1(300,545) v1(300,594.09)
ENC_A: C6.2 R11.1 SW10.5 U2.70 | length 995.1
  Top Layer w10: U2.70 2859.72,1707.8 C6.2 ; R11.1 C6.2 ; SW10.5 2913.39,1645.87 C6.2
ENC_B: C7.1 R17.1 SW10.3 U2.71 | length 1251.3
  Top Layer w10: U2.71 3082.95,1727.48 R17.1 C7.1 3102.48,1562.87 SW10.3
GND: C1.2 C2.1 C3.1 C4.2 C5.2 C6.1 C7.2 C12.1 C13.1 C14.1 C16.1 C17.1 C18.2 C26.1 C27.1 C28.1 C29.1 C30.1 C31.1 C32.2 C33.2 P1.6 P1.9 P2.1 P3.5 P3.6 P5.3 P6.4 P7.2 P8.3 P9.2 P10.1 P10.3 P12.4 R2.2 R16.2 R28.2 R34.2 R35.2 SW1.2 SW2.2 SW3.2 SW4.2 SW5.1 SW6.1 SW7.1 SW8.1 SW9.2 SW10.2 SW10.4 SW12.3 SW12.4 U1.2 U2.10 U2.27 U2.74 U2.99 U3.8 U3.10 U3.15 U5.2 U6.4 | length 460.5
  Top Layer w10: C30.1@1430.79,1687.48 1430.79,1668.69 1470.42,1629.06 U2.10 ; C18.2 1535,1185 1583.46,1233.46 U2.27 ; U2.74 2136.54,1786.54 2170,1820 2197.48,1820 C27.1 ; U6.4 2438.5,1371.22 C31.1
  other v1: 1190,100 1775,100 2370,100.93 3020,113.78 811.86,330 3210,531.5 621.06,546.29 1830,710 1300.79,732.57 841.46,840.9 2226.56,900 590,930 2610,950 1829.1,957.48 1447.03,970 1000,1001.18 70,1222.67 546.31,1250 3320,1259.84 3013.44,1267.12 1749.56,1440.07 2610,1448.06 2280,1450 811.86,1520 70,1525.63 2192.27,1550.32 3290,1570 1642.52,1639.25 2312.88,1646.56 1020,1648.74 500,1654.76 2560,1655 1362.86,1692.14 1647.71,1740.58 70,1866.18 1490,1895 1144.23,2040.08 1391.07,2040.08 870,2059.26 1971.77,2092.2 1311.43,2135.67 1037.12,2142.7 290.53,2156.42 70,2237.84 2681.54,2257.73 1131.56,2290 896.85,2291.9 1031.56,2311.56 2434.6,2333.23 2257.48,2408.59 1953.23,2487.2 3092.28,2500 3410,2570 3410,2950 2790,2960 2460,3004.68 2124.63,3080
I2C1_SCL: P9.3 R31.1 U2.95 | length 2174.3
  Top Layer w10: U2.95 1662.2,2200 1847.2,2385 v1(1859.06,2385) ; v1(2095,2385) 2100,2380 2650,2930 2650,3312.48 ; R31.1 2650,3312.48 ; P9.3 2650,3312.48
  Bottom Layer w10: v1(1859.06,2385) v1(2095,2385)
I2C1_SDA: P9.4 R32.2 U2.96 | length 2152.8
  Top Layer w10: U2.96 1642.52,2211.57 1860.94,2430 v1(1870,2430) ; v1(2110,2430) 2390,2710 2390,3190 P9.4 2550,3272.48 R32.2
  Bottom Layer w10: v1(1870,2430) v1(2110,2430)
IN1: P11.2 U4.49 | length 408.4
  Top Layer w10: U4.49 1398.43,3147.64 P11.2
IN2: P11.4 U4.51 | length 383.3
  Top Layer w10: U4.51 1359.06,3208.27 P11.4
IN3: P11.6 U4.53 | length 358.2
  Top Layer w10: U4.53 1319.69,3268.9 P11.6
IN4: P11.8 U4.55 | length 333.1
  Top Layer w10: U4.55 1280.31,3329.53 P11.8
IN5: P11.10 U4.57 | length 341.2
  Top Layer w10: P11.10 1240.94,3309.84 U4.57
IN6: P11.12 U4.59 | length 366.4
  Top Layer w10: P11.12 1201.57,3249.21 U4.59
IN7: P11.14 U4.61 | length 391.5
  Top Layer w10: P11.14 1162.2,3188.58 U4.61
IN8: P11.16 U4.63 | length 416.6
  Top Layer w10: P11.16 1122.83,3127.95 U4.63
KEY: SW10.1 U2.64 | length 1327
  Top Layer w10: U2.64 2751.89,1589.68 2913.39,1428.19 SW10.1
KEY_CLK: U2.2 U3.2 | length 1311
  Top Layer w10: U3.2 v1(486.3,1404.53) ; v1(1365,1810) 1388.46,1786.54 U2.2
  Bottom Layer w10: v1(486.3,1404.53) 486.3,1491.3 805,1810 v1(1365,1810)
KEY_Q: U2.3 U3.7 | length 1511.5
  Top Layer w10: U3.7 420.75,1155 v1(485,1155) ; v1(1365,1770) 1368.15,1766.85 U2.3
  Bottom Layer w10: v1(485,1155) 515,1185 515,1480 805,1770 v1(1365,1770)
KEY_SL: U2.1 U3.1 | length 1259.9
  Top Layer w10: U3.1 450,1484.25 v1(450,1491.26) ; v1(1365,1850) 1408.78,1806.22 U2.1
  Bottom Layer w10: v1@455,1500 805,1850 v1(1365,1850)
LED: R8.2 U2.67 | length 1279.7
  Top Layer w10: U2.67 2133.74,1648.74 v1(2160,1675) ; v1(2170,2080) 2168.19,2081.81 2168.19,2413.19 2267.52,2512.52 R8.2
  Bottom Layer w10: v1(2160,1675) 2160,2070 v1(2170,2080)
NetC2_2: C2.2 U1.4 | length 67
  Top Layer w10: U1.4 287.48,1847.24 C2.2
NetC8_1: C8.1 U4.44 U4.45 | length 145.5
  Top Layer w10: U4.44 1511.1,2868.9 1530.79,2888.58 ; U4.45 1530.79,2888.58 ; C8.1@1558.31,2890 1556.89,2888.58 1530.79,2888.58
NetC9_1: C9.1 U4.42 | length 83.1
  Top Layer w10: U4.42 C9.1
NetC10_1: C10.1 U4.39 | length 86.5
  Top Layer w10: U4.39 1547.83,2770.47 C10.1
NetC11_1: C11.1 U4.36 | length 87.8
  Top Layer w10: U4.36 1547.83,2711.42 C11.1
NetC16_2: C16.2 U2.73 | length 100.7
  Top Layer w10: U2.73 2179.37,1766.85 C16.2
NetC17_2: C17.2 U2.49 | length 75.1
  Top Layer w10: C17.2 2016.54,1214.02 U2.49
NetC19_2: C19.2 L1.2 L2.1 | length 118.6
  Top Layer w10: C19.2@1624.17,3145 C19.2
  Top Layer w20: C19.2@1624.17,3145 L2.1 L1.2
NetD1_2: D1.2 R2.1 | length 75.4
  Top Layer w10: R2.1 222.52,2143.27 D1.2
NetD2_2: D2.2 R8.1 | length 70
  Top Layer w10: R8.1 D2.2
NetD3_2: D3.2 R26.1 | length 70
  Top Layer w10: R26.1 D3.2
NetD4_2: D4.2 R27.1 | length 70
  Top Layer w10: R27.1 D4.2
NetR12_1: R12.1 SW6.2 U3.4 | length 528.7
  Top Layer w10: SW6.2@240.16,1229.33 240.16,1369.09 290.53,1369.09 ; R12.1 288.39,1371.24 290.53,1369.09 ; U3.4 405.47,1304.53 340.91,1369.09 290.53,1369.09
NetR13_1: R13.1 SW5.2 U3.3 | length 701.2
  Top Layer w10: R13.1 359.37,1609.37 360,1610 ; U3.3 418.35,1354.53 360,1412.88 360,1610 ; SW5.2@621.06,1767.72 481.3,1767.72 360,1646.42 360,1610
NetR14_1: R14.1 SW4.1 U3.14 | length 3545.6
  Top Layer w10: U3.14 643.78,1353.46 v1(750,1353.46) 750,1287.01 R14.1 ; v1(2900,279.53) 2941.93,279.53 SW4.1@3081.69,279.53
  Bottom Layer w10: v1(750,1353.46) 750,700 1115,335 2844.53,335 v1(2900,279.53)
NetR15_1: R15.1 SW3.1 U3.13 | length 2781.2
  Top Layer w10: U3.13 647.24,1300 v1(725,1300) 725,1265 839.57,1150.43 R15.1 ; v1(2250,280) 2250.47,279.53 2292.32,279.53 SW3.1@2432.09,279.53
  Bottom Layer w10: v1(725,1300) 725,690 1105,310 2220,310 v1(2250,280)
NetR16_1: R16.1 U2.37 | length 83.4
  Top Layer w10: R16.1 1780.31,1217.17 U2.37
NetR18_2: R18.2 SW8.2 U3.6 | length 761.1
  Top Layer w10: R18.2 390,1040 ; U3.6 382.01,1204.53 340.91,1163.43 340.91,1089.09 390,1040 ; SW8.2@621.06,830.71 481.3,830.71 481.3,948.7 390,1040
NetR19_2: R19.2 SW7.2 U3.5 | length 893.1
  Top Layer w10: R19.2 255.91,1140.91 369.53,1254.53 U3.5 469.53,1254.53 592.32,1377.32 862.2,1377.32 862.2,1369.09 SW7.2@862.2,1229.33
NetR20_2: R20.2 SW2.1 U3.12 | length 2087
  Top Layer w10: U3.12 v1(700,1254.53) 780,1174.53 R20.2 ; v1(1662.2,279.53) 1701.77,279.53 SW2.1@1841.54,279.53
  Bottom Layer w10: v1(700,1254.53) 701.81,1252.72 701.81,683.19 1105.47,279.53 v1(1662.2,279.53)
NetR21_2: R21.2 SW1.1 U3.11 | length 1350.9
  Top Layer w10: v1(680,1204.53) 720,1164.53 R21.2 ; v1(1070.79,280) 1071.26,279.53 1111.22,279.53 SW1.1@1250.98,279.53
  Bottom Layer w10: v1(680,1204.53) 680,670.79 v1(1070.79,280)
NetR28_1: R28.1 U2.94 | length 659.9
  Top Layer w10: U2.94 1681.89,2187.68 1774.21,2280 1775,2280 v1(1800,2305) ; v1(1885,2210) R28.1
  Bottom Layer w10: v1(1800,2305) 1885,2220 v1(1885,2210)
NetR29_2: R29.2 U5.9 | length 89.3
  Top Layer w10: U5.9 430.16,465 475,420.16 R29.2
NetR34_1: R34.1 U2.20 | length 125.7
  Top Layer w10: U2.20 1567.2,1432.2 v1(1570,1435)
  Bottom Layer w10: v1(1570,1435) 1587.52,1452.52 R34.1@1620,1452.52
NRST: C5.1 R4.1 SW9.1 U2.14 | length 1696.1
  Top Layer w10: R4.1 424.45,2248.03 481.3,2248.03 621.06,2248.03 694.45,2248.03 C5.1 702.48,2240 v1(760,2240) ; v1(1370,1500) 1370,1510 1410.31,1550.32 U2.14
  Bottom Layer w10: v1(760,2240) 810,2240 1100,1950 1355,1950 1390,1915 1390,1520 v1(1370,1500)
OLED_CS: P2.7 U2.29 | length 843.3
  Top Layer w10: P2.7 1599.53,620 1599.53,1119.53 1622.83,1142.83 U2.29
OLED_DC: P2.6 U2.31 | length 818.1
  Top Layer w10: P2.6 1571.65,511.65 1635,575 1635,1052.8 1662.2,1080 U2.31
OLED_MOSI: P2.4 U2.32 | length 823.5
  Top Layer w10: v1(1675,1035) 1681.89,1041.89 U2.32
  Bottom Layer w10: v1(1675,1035) 1675,588.78 P2.4
OLED_RST: P2.5 U2.33 | length 793
  Top Layer w10: P2.5 1701.57,522.05 U2.33
OLED_SCK: P2.3 U2.30 | length 882.3
  Top Layer w10: v1(1635,1105) 1642.52,1112.52 U2.30
  Bottom Layer w10: v1(1635,1105) 1635.85,1105 1700,1040.85 1700,663.78 P2.3
OSC_IN: C1.1 R6.2 U2.12 X1.2 | length 482.8
  Top Layer w10: R6.2@1170,1602.48 1170,1697.52 1296.73,1697.52 1299.21,1700 1299.21,1685.79 1395.31,1589.68 U2.12
OSC_OUT: C4.1 R6.1 U2.13 X1.1 | length 501.9
  Top Layer w10: R6.1@1170,1537.52 1170,1437.48 1291.69,1437.48 1299.21,1445 1299.21,1469.21 1400,1570 U2.13
PE0: P10.2 U2.97 | length 1680.4
  Top Layer w10: U2.97 1622.83,2222.83 2020,2620 2020,3270 P10.2
PE1: P10.4 U2.98 | length 1647.1
  Top Layer w10: U2.98 1603.15,2232.83 2000,2629.68 P10.4
PWM1: SW12.1 U2.23 | length 2708.8
  Top Layer w10: U2.23 1753.78,1373.15 1765.63,1385 1998.19,1385 2014.09,1369.09 2035.91,1369.09 v1(2040,1365) ; v1(2195,2155) 2195,2190 2445,2440 2700,2440 2971.42,2711.42 3124.8,2711.42 SW12.1
  Bottom Layer w10: v1(2040,1365) 2062.94,1365 2251.81,1553.87 2251.81,2095 2195,2151.81 v1(2195,2155)
PWM2: SW12.6 U2.24 | length 2597.4
  Top Layer w10: U2.24 1755.94,1353.46 1767.48,1365 1991.54,1365 v1(2016.54,1340) ; v1(2190,2230) 2425,2465 2681.54,2465 SW12.6
  Bottom Layer w10: v1(2016.54,1340) 2077.94,1340 2275,1537.06 2275,2120 2190,2205 v1(2190,2230)
PWM_OUT1: P5.1 SW12.2 | length 460.6
  Top Layer w10: P5.1 3105,3205 3105,2898.94 SW12.2
PWM_OUT2: P8.1 SW12.5 | length 457.9
  Top Layer w10: SW12.5 3037.52,2899.72 3037.52,3212.48 P8.1
SDIO_CMD: P1.3 R5.2 U2.83 | length 1365.8
  Top Layer w10: U2.83 1898.43,1948.43 1970,2020 v1(1971.65,2020) ; v1(2097.24,2020) 3000,2020 v1(3020,2040) 3077.52,2040 R5.2
  Bottom Layer w10: v1(1971.65,2020) v1(2097.24,2020) ; P1.3 2966.69,2040 v1(3020,2040)
SDIO_D0: P1.7 R9.2 U2.65 | length 1570
  Top Layer w10: U2.65 2214.37,1609.37 v1(2220,1615) ; v1(2230,2070) 2235,2065 2910,2065 3020,2175 v1(3020,2210) R9.2
  Bottom Layer w10: v1(2220,1615) v1@2220,2065 ; P1.7 2969.92,2210 v1(3020,2210)
SDIO_D1: P1.8 R10.2 U2.66 | length 1578.4
  Top Layer w10: U2.66 2174.06,1629.06 v1(2185,1640) ; v1(2205,2105) 2213.7,2096.3 2856.3,2096.3 v1(3020,2260) 3077.52,2260 R10.2
  Bottom Layer w10: v1(2185,1640) 2200,1655 2200,2100 v1(2205,2105) ; P1.8 2970,2260 v1(3020,2260)
SDIO_D2: P1.1 R1.2 U2.78 | length 1217.1
  Top Layer w10: U2.78 1996.85,1916.85 2030,1950 v1(3020,1950) 3067.52,1950 R1.2
  Bottom Layer w10: P1.1 2970.08,1950 v1(3020,1950)
SDIO_D3: P1.2 R3.2 U2.79 | length 1254.6
  Top Layer w10: U2.79 1977.17,1927.17 2045,1995 v1(3020,1995) 3082.52,1995 R3.2
  Bottom Layer w10: P1.2 2968.39,1995 v1(3020,1995)
SDIO_SCK: P1.5 R7.2 U2.80 | length 1333.7
  Top Layer w10: U2.80 1957.48,1940.32 2062.17,2045 2945,2045 v1(3020,2120) R7.2
  Bottom Layer w10: P1.5 2973.31,2120 v1(3020,2120)
SPI2_CS: U2.51 U6.1 | length 378.4
  Top Layer w10: U2.51 2121.22,1333.78 2175,1280 2347.28,1280 U6.1
SPI2_MISO: U2.53 U6.2 | length 374
  Top Layer w10: U2.53 2136.85,1373.15 2180,1330 2347.28,1330 U6.2
SPI2_MOSI: U2.54 U6.5 | length 111.1
  Top Layer w10: U2.54 2154.88,1392.83 U6.5@2192.72,1355
SPI2_SCK: U2.52 U6.6 | length 130.5
  Top Layer w10: U2.52 2134.02,1353.46 2182.48,1305 U6.6
SPI3_CS1: P7.6 U2.92 | length 1843.2
  Top Layer w10: U2.92 1721.26,2161.26 2280,2720 2280,3380 P7.6
SPI3_CS2: P7.7 U2.93 | length 1809.9
  Top Layer w10: U2.93 1701.57,2171.57 2250,2720 P7.7
SPI3_MISO: P7.4 U2.90 | length 1933.2
  Top Layer w10: U2.90 1760.63,2150.63 2330,2720 2330,3270 2510,3450 P7.4
SPI3_MOSI: P7.5 U2.91 | length 1876.5
  Top Layer w10: U2.91 1740.94,2159.41 2310,2728.46 2310,3310 P7.5
SPI3_SCK: P7.3 U2.89 | length 2001.6
  Top Layer w10: U2.89 1780.31,2143.15 2360,2722.83 2360,3260 2500,3400 2600,3400 P7.3
SWCLK: P12.3 U2.76 | length 1703
  Top Layer w10: U2.76 2103.98,1935 2985,1935 3040,1880 3170,1880 3430,1620 3430,1540 P12.3
SWDIO: P12.2 U2.72 | length 1766.9
  Top Layer w10: U2.72 2297.17,1747.17 2470,1920 2977.52,1920 3037.52,1860 3168.79,1860 3410,1618.79 3410,1460 P12.2
UART1_RX: R26.2 U2.69 U5.21 | length 2369.4
  Top Layer w10: R26.2 375,736.47 449.84,661.63 ; U5.21 449.84,661.63 ; v1(1320,1165) 1320,1155 855,690 478.21,690 449.84,661.63 ; v1(1685,1690) 1686.89,1688.11 U2.69
  Bottom Layer w10: v1(1320,1165) 1324.15,1165 1359.15,1200 1430,1200 1683.19,1453.19 1683.19,1688.19 v1(1685,1690)
UART1_TX: R27.2 U2.68 U5.20 | length 2468.1
  Top Layer w10: v1(310,715) 315,720 R27.2 ; U5.20 469.53,653.23 486.3,670 865,670 v1@1355,1160 ; v1@1706.57,1668.43 U2.68
  Bottom Layer w10: v1(310,715) 478.98,715 v1(530,663.98) ; v1(1360,1170) 1431.65,1170 1705,1443.35 v1(1705,1665)
UART2_RX: P6.3 U2.26 | length 1593.1
  Top Layer w10: P6.3 600,345 1525,1270 1561.02,1270 U2.26
UART2_TX: P6.2 U2.25 | length 1649.1
  Top Layer w10: P6.2 580,180 580,355 1502.76,1277.76 U2.25
UART_VDD: C12.2 C13.2 D3.1 D4.1 R29.1 U5.5 U5.6 | length 1117
  Top Layer w10: v1(275,960) 372.48,960 D3.1 ; C13.2 C12.2 363.23,420.71 U5.6 ; v1(335,510) 335.79,510.79 U5.6 ; U5.5 U5.6 ; R29.1 526.18,398.7 v1(526.18,426.77)
  Bottom Layer w10: v1(275,960) 275,690 335,630 v1(335,510) 442.95,510 v1(526.18,426.77)
VCC: C3.2 C15.2 C18.1 C26.2 C27.2 C28.2 C29.2 C30.2 C31.2 D1.1 D2.1 P1.4 P2.2 P12.1 R1.1 R3.1 R4.2 R5.1 R7.1 R9.1 R10.1 R31.2 R32.1 R33.1 SW11.5 SW11.6 SW11.7 SW11.8 U1.5 U2.6 U2.11 U2.19 U2.28 U2.50 U2.75 U2.100 U4.7 U4.23 U4.34 U6.3 U6.7 U6.8 | length 14586.1
  Top Layer w10: D1.1 325.04,2282.48 R4.2 ; U1.5 284.13,1986.65 C3.2 ; v1(650,2514.15) 650,2511.02 SW11.8 SW11.7 SW11.6 SW11.5 352.52,2363.54 R4.2 ; v1(675,2834.65) v1(970,2834.65) 975.12,2829.53 U4.7 ; v1(1080,1137.52) 1055,1162.52 1055,1470 925,1600 925,1990 ; v1(1220,2615) 1221.26,2613.74 U4.23 ; v1(1425,2645) 1425,2655.1 1441.95,2672.05 U4.34 ; C28.2 1431.75,1427.48 1456.16,1451.89 U2.19 1556.04,1451.89 1592.48,1488.33 1592.48,1610 ; C30.2@1430.79,1622.52 1443.94,1609.37 U2.11 1591.85,1609.37 1592.48,1610 ; U2.6 1542.8,1707.8 ; C26.2 1563.78,1924.06 U2.100 ; v1(1575,1140) 1592.48,1157.48 C18.1 1603.15,1195.67 U2.28 ; U2.50 2036.22,1228.78 C29.2 U6.8@2205.2,1202.48 ; U2.75 2118.74,1806.22 C27.2 2167.52,1882.52 2180,1895 2284.33,1895 v1(2325,1854.33) ; U6.7 U6.8 U6.8@2205.2,1202.48 ; v1(2360,1365) 2362.28,1365 U6.3 2423.54,1306.26 C31.2 2490,1190 2460,1160 2247.68,1160 U6.8@2205.2,1202.48 ; R32.1 R31.2 v1(2560,3115) ; v1(2565,2755) 2590,2730 D2.1 ; R1.1 R3.1 R5.1 R5.1@3152.48,2060 ; R10.1 R9.1 R7.1 R5.1@3152.48,2060 ; v1(3185,2085) 3160,2060 R5.1@3152.48,2060 ; P12.1 3480,1030 3180,730 2221.85,730 1983.98,492.13 P2.2 1971.65,886.18 2205.2,1119.72 U6.8@2205.2,1202.48 ; C3.2 925,1990 ; C3.2 352.52,2055.04 R4.2 ; 925,1990 1290,1990 1412.76,1867.24 U2.100 ; 1542.8,1707.8 1544.13,1707.8 1592.48,1659.45 1592.48,1610 ; 1542.8,1707.8 1563.78,1728.78 U2.100
  Bottom Layer w10: v1(650,2514.15) 675,2539.15 v1(675,2834.65) ; v1(970,2834.65) 970,2675.16 992.64,2652.52 C15.2 C15.2@1220,2647.52 ; v1(1220,2615) C15.2@1220,2647.52 ; R33.1 1247.52,1305.04 v1(1080,1137.52) 1572.52,1137.52 v1(1575,1140) 1675,1140 1735,1080 2165,1080 v1(2205,1120) ; v1(1425,2645) 1423.19,2646.81 1220.71,2646.81 C15.2@1220,2647.52 ; v1(2360,1365) 2360,1819.33 v1(2325,1854.33) ; v1(2560,3115) 2565,3110 v1(2565,2755) 2490,2680 2490,2180 2325,2015 v1(2325,1854.33) ; v1(3185,2085) 3183.39,2083.39 P1.4 2913.39,2083.39 2869.33,2039.33 2869.33,1904.33 2819.33,1854.33 v1(2325,1854.33)
VDDA: C32.1 C33.1 R33.2 U2.21 U2.22 | length 351.6
  Top Layer w10: U2.21 U2.22 1562.83,1392.83 v1(1570,1400)
  Bottom Layer w10: R33.2 1367.48,1395 C33.1 C32.1 1437.52,1400 v1(1570,1400)
pads on no net: P1. P3.4 SW1. SW2. SW3. SW4. SW5. SW6. SW7. SW8. SW9. SW10. U2.4 U2.5 U2.7 U2.8 U2.9 U2.34 U2.35 U2.36 U2.47 U2.48 U2.58 U2.77 U2.84 U2.86 U2.87 U3.9 U4.15 U5.1 U5.10 U5.11 U5.12 U5.13 U5.14 U5.15 U5.16 U5.17 U5.18 U5.19 U5.22 U5.23 U5.24 U5.25

## Polygon pours and split planes (outlines as drawn)
GND on Bottom Layer "Bottom Layer-GND" (solid, pour order 10): 1770,3550 3550,3550 3550,0 0,0 0,2380 1770,2380
AGND on Bottom Layer "Bottom Layer-AGND" (solid, pour order 2): 0,3550 1730,3550 1730,2420 0,2420
GND on Top Layer "Top Layer-GND" (solid, pour order 8): 1770,3550 3550,3550 3550,0 0,0 0,2380 1770,2380
AGND on Top Layer "Top Layer-AGND" (solid, pour order 4): 0,3550 1730,3550 1730,2420 0,2420

## Silkscreen, mask and mechanical layers (free items; w line width, h text height)
Top Overlay:
  lines w10: 1102.36,433.07 1102.36,2283.46 2440.94,2283.46 2440.94,433.07 1102.36,433.07
  text "4" at 389.21,3254.99 h35
  text "1" at 689.21,3254.99 h35
  text "1" at 1590,3254.99 h35
  text "2" at 1989.21,3254.99 h35
  text "1" at 2089.21,3254.99 h35
  text "8" at 890,3254.25 h35
  text "2" at 2990,3150 h35
  text "1" at 3140,3150 h35
  text "0" at 465,2860 h35
  text "1" at 520,2860 h35
  text "2" at 565,2860 h35
  text "R" at 615,2860 h35
  text "G" at 3410,1580 h35 r90
  text "CK" at 3410,1460 h35 r90
  text "IO" at 3410,1365 h35 r90
  text "3V3" at 3410,1230 h35 r90
  text "NickelBird" at 2700,732.57 h60
  text "V0.1" at 2900,619.68 h60
  text "cfrpg" at 2850,531.5 h60
  text "+5" at 370,160 h35
  text "TX" at 470,160 h35
  text "RX" at 570,160 h35
  text "GND" at 670,160 h35
Mechanical 1:
  the board outline again, w10